# Altium PCB Panel_of_Digital_Clock_3.0.PcbDoc
Units mm, origin at the board's own origin, x right, y up, seen from the top; angles counter-clockwise.
Board outline 81 x 93 mm, 2 copper layers (Top Layer, Bottom Layer); 4 components, 0 nets, 20 pads, 0 vias.
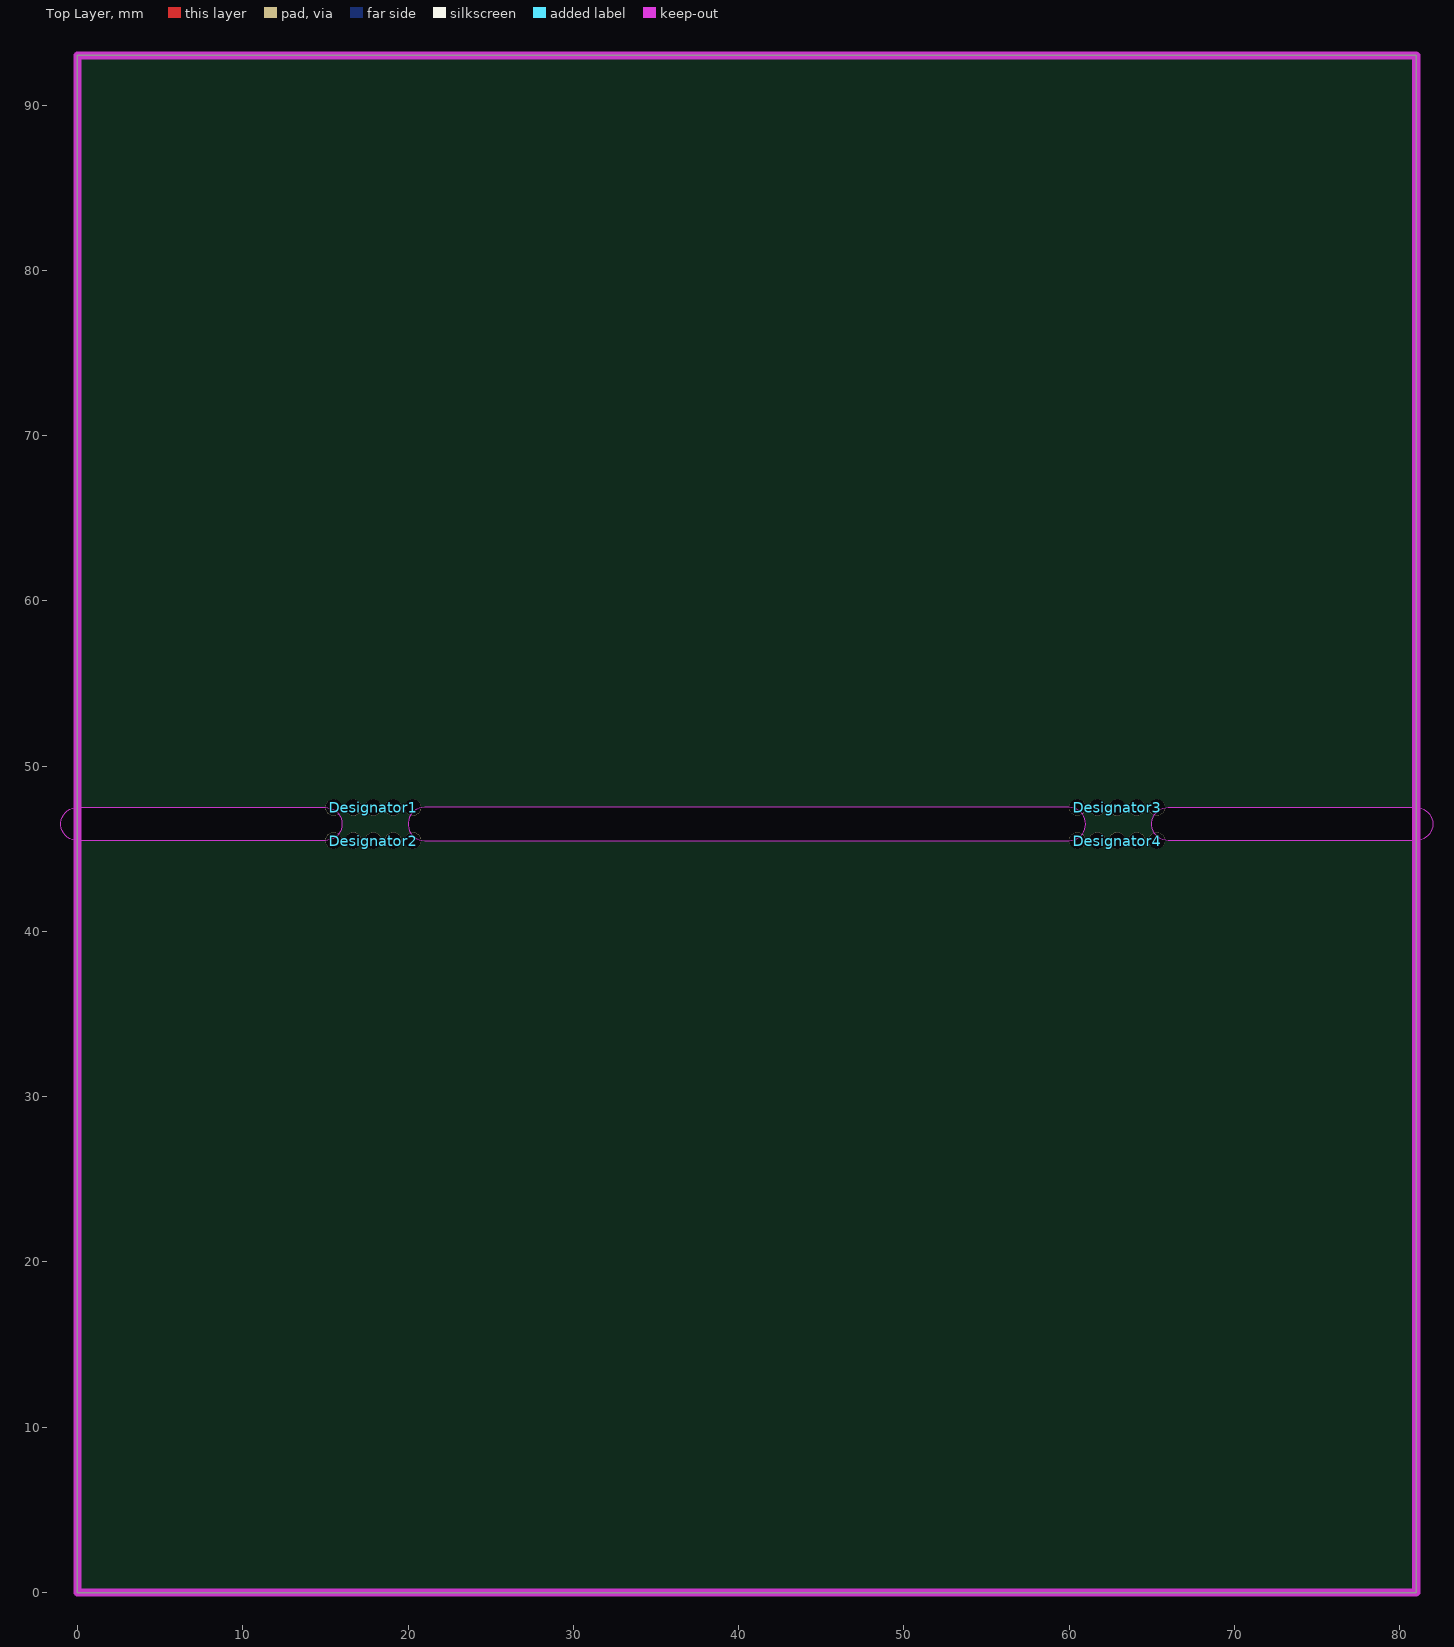
[diagram p0: Top Layer view]
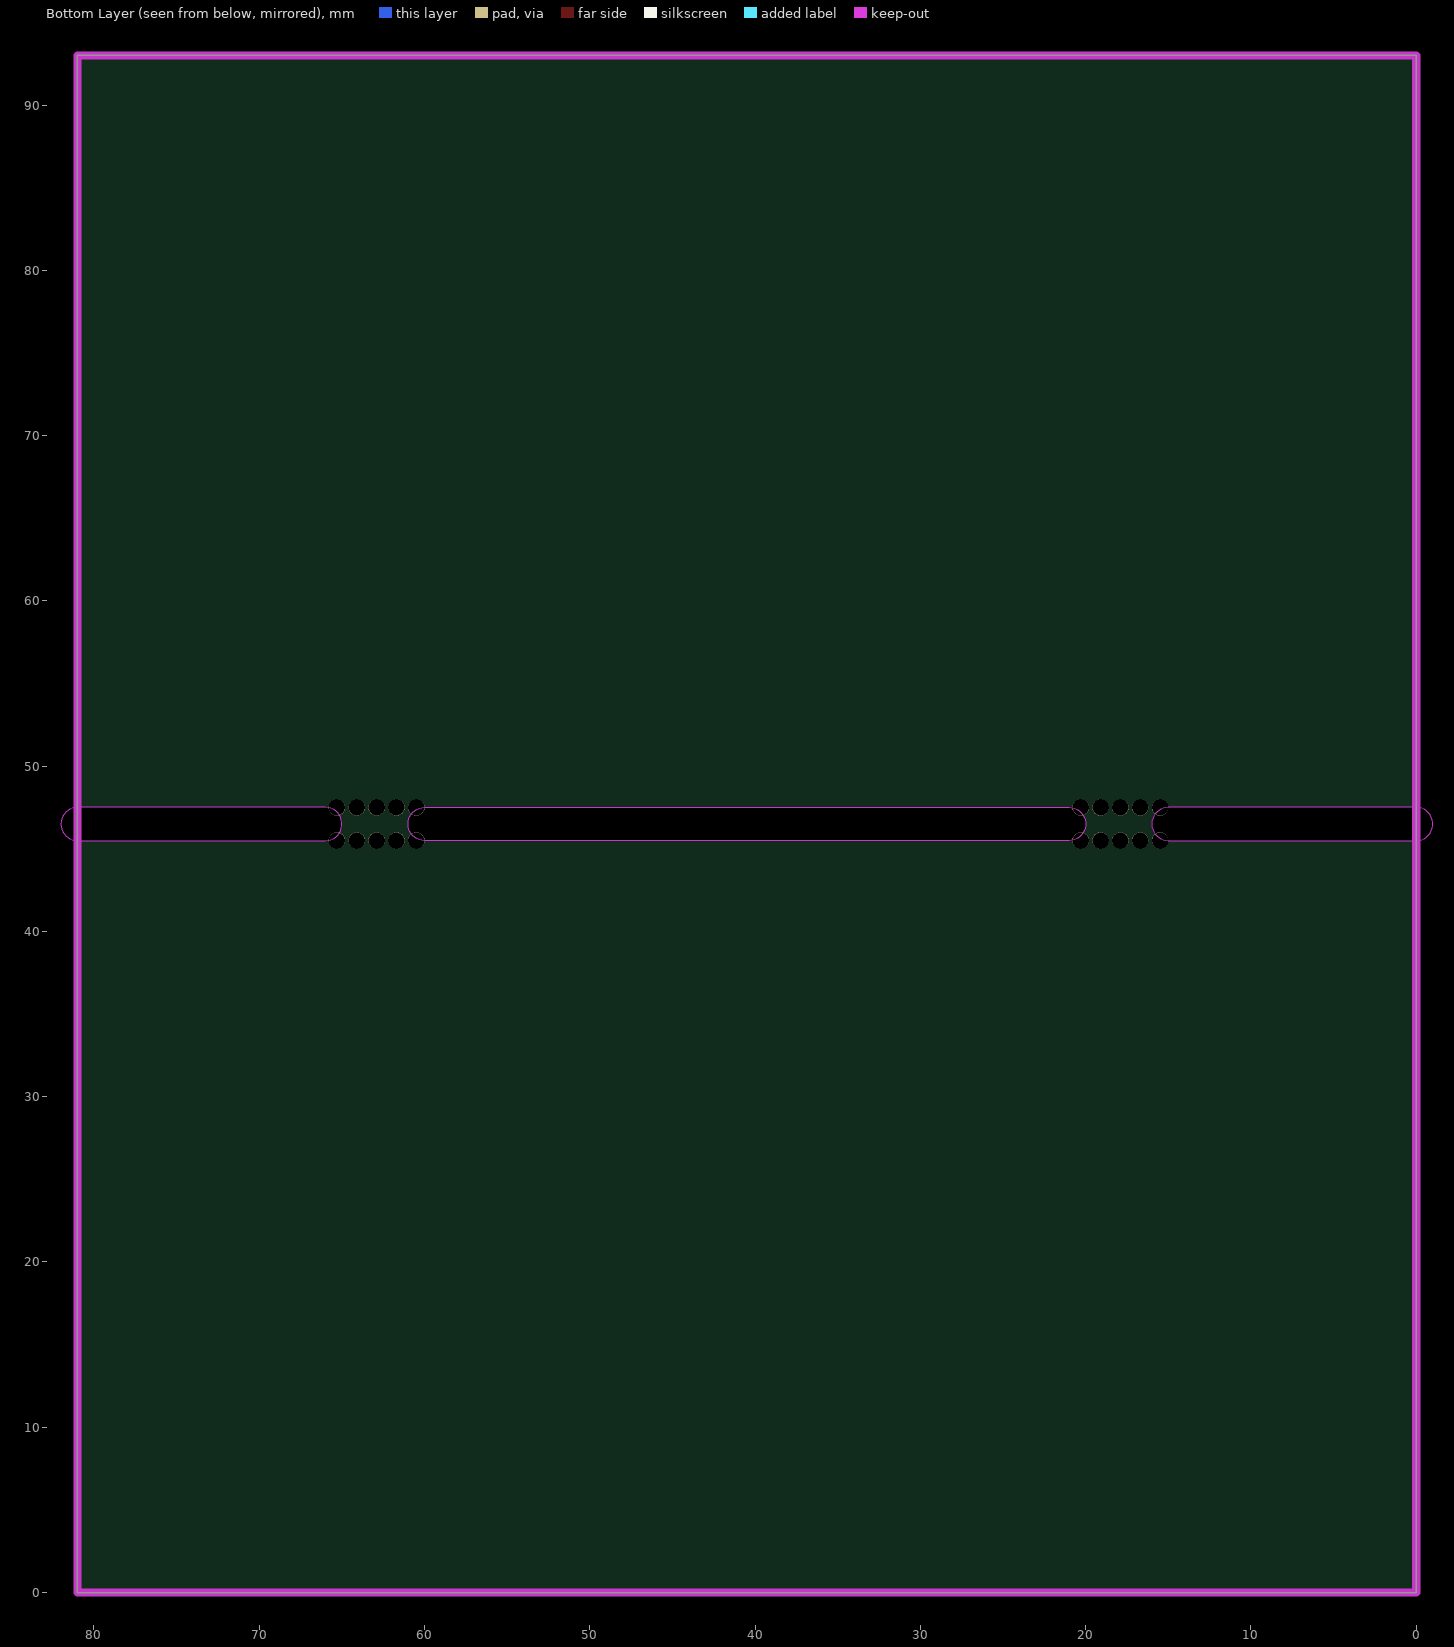
[diagram p1: Bottom Layer view, seen from below]

## Layer stack, top to bottom
Top Solder: solder mask 0.0102, Solder Resist, Dk 3.5
Top Layer: signal copper 0.0356
Dielectric 1: dielectric 0.32, FR-4, Dk 4.8
Bottom Layer: signal copper 0.0356
Bottom Solder: solder mask 0.0102, Solder Resist, Dk 3.5

## Board outline
0,0 81,0 81,93 0,93
cut-out: 66,45.5 cw(c66,46.5) 66,47.5 81,47.5 cw(c81,46.5) 82,46.5 cw(c81,46.5) 81,45.5
cut-out: 21,45.5 60,45.5 ccw(c60,46.5) 61,46.5 ccw(c60,46.5) 60,47.5 21,47.5 ccw(c21,46.5)
cut-out: 0,45.5 cw(c0,46.5) 0,47.5 15,47.5 cw(c15,46.5) 16,46.5 cw(c15,46.5) 15,45.5

## Design rules (kind name [scope] priority, off if disabled: settings)
Clearance [All] p1: gap=0.254 ignorepadtopadclearanceinfootprint=FALSE except(0: Arc-Hole Track-Hole SMDPad-Hole THPad-Hole Via-Hole Fill-Hole Poly-Hole Region-Hole Text-Hole)
PolygonConnect [All] p1: connectstyle=Relief reliefconductorwidth=0.254 reliefentries=4 polygonreliefangle="90 Angle" airgapwidth=0.254
RoutingVias [All] p1: holewidth=0.711 width=1.27 viastyle="Through Hole" minholewidth=0.711 minwidth=1.27 maxholewidth=0.711 maxwidth=1.27
SolderMaskExpansion [All] p1: expansion=0.102 istentingtop=FALSE
Width [All] p1: maxlimit=0.254 minlimit=0.254 preferedwidth=0.254
30 further rules are at their usual default settings.

## Components (designator, comment, footprint, x,y, rotation, side; value= is the part's Value field where it differs from the comment)
Designator1 "Comment" "Stamp Hole" 15.5,47.5 r0 top
Designator2 "Comment" "Stamp Hole" 15.5,45.5 r0 top
Designator3 "Comment" "Stamp Hole" 60.5,47.5 r0 top
Designator4 "Comment" "Stamp Hole" 60.5,45.5 r0 top

## Footprints (in the part's own frame and the unit in brackets; to place one, negate y for a bottom-side part, rotate by r counter-clockwise, add the part's x,y. Pads: shape width x height; smd on the part's side, far side on the other; paste and mask are expansions set on the pad)
"Stamp Hole" [mm]
  round 1 hole 1: 6(0,0) 7(1.2,0) 8(2.4,0) 9(3.6,0) 10(4.8,0)

## Nets (pads, with @x,y where several pads share a name; then routed paths per layer and width w, separated by ;. In a path a pad name is that pad's centre, name@x,y a point inside that pad or via, vN(x,y) a via of type N, cw(c..) or ccw(c..) an arc to the next point about the centre after c; other vN are vias at no path point)
pads on no net: Designator1.6 Designator1.7 Designator1.8 Designator1.9 Designator1.10 Designator2.6 Designator2.7 Designator2.8 Designator2.9 Designator2.10 Designator3.6 Designator3.7 Designator3.8 Designator3.9 Designator3.10 Designator4.6 Designator4.7 Designator4.8 Designator4.9 Designator4.10

## Keep-outs
Keep-Out Layer:
  the board outline again, w0.508

## Silkscreen, mask and mechanical layers (free items; w line width, h text height)
Mechanical 1:
  lines w2: 0,46.5 15,46.5 ; 21,46.5 60,46.5 ; 66,46.5 81,46.5

## Panel: embedded boards
"D:\A_Minh\B_Altium_Projects\PIF_Projects\Digital_Clock\Digital_Clock_PCB_3.0.PcbDoc" at 0,0, 2 rows x 1 columns, spacing 47.509 x 82.509, rotation 0